# Altium PCB PCB1.PcbDoc
Units mil, origin at the board's own origin, x right, y up, seen from the top; angles counter-clockwise.
Board outline 2700 x 2100 mil, 2 copper layers (Top Layer, Bottom Layer); 15 components, 31 nets, 64 pads, 10 vias.
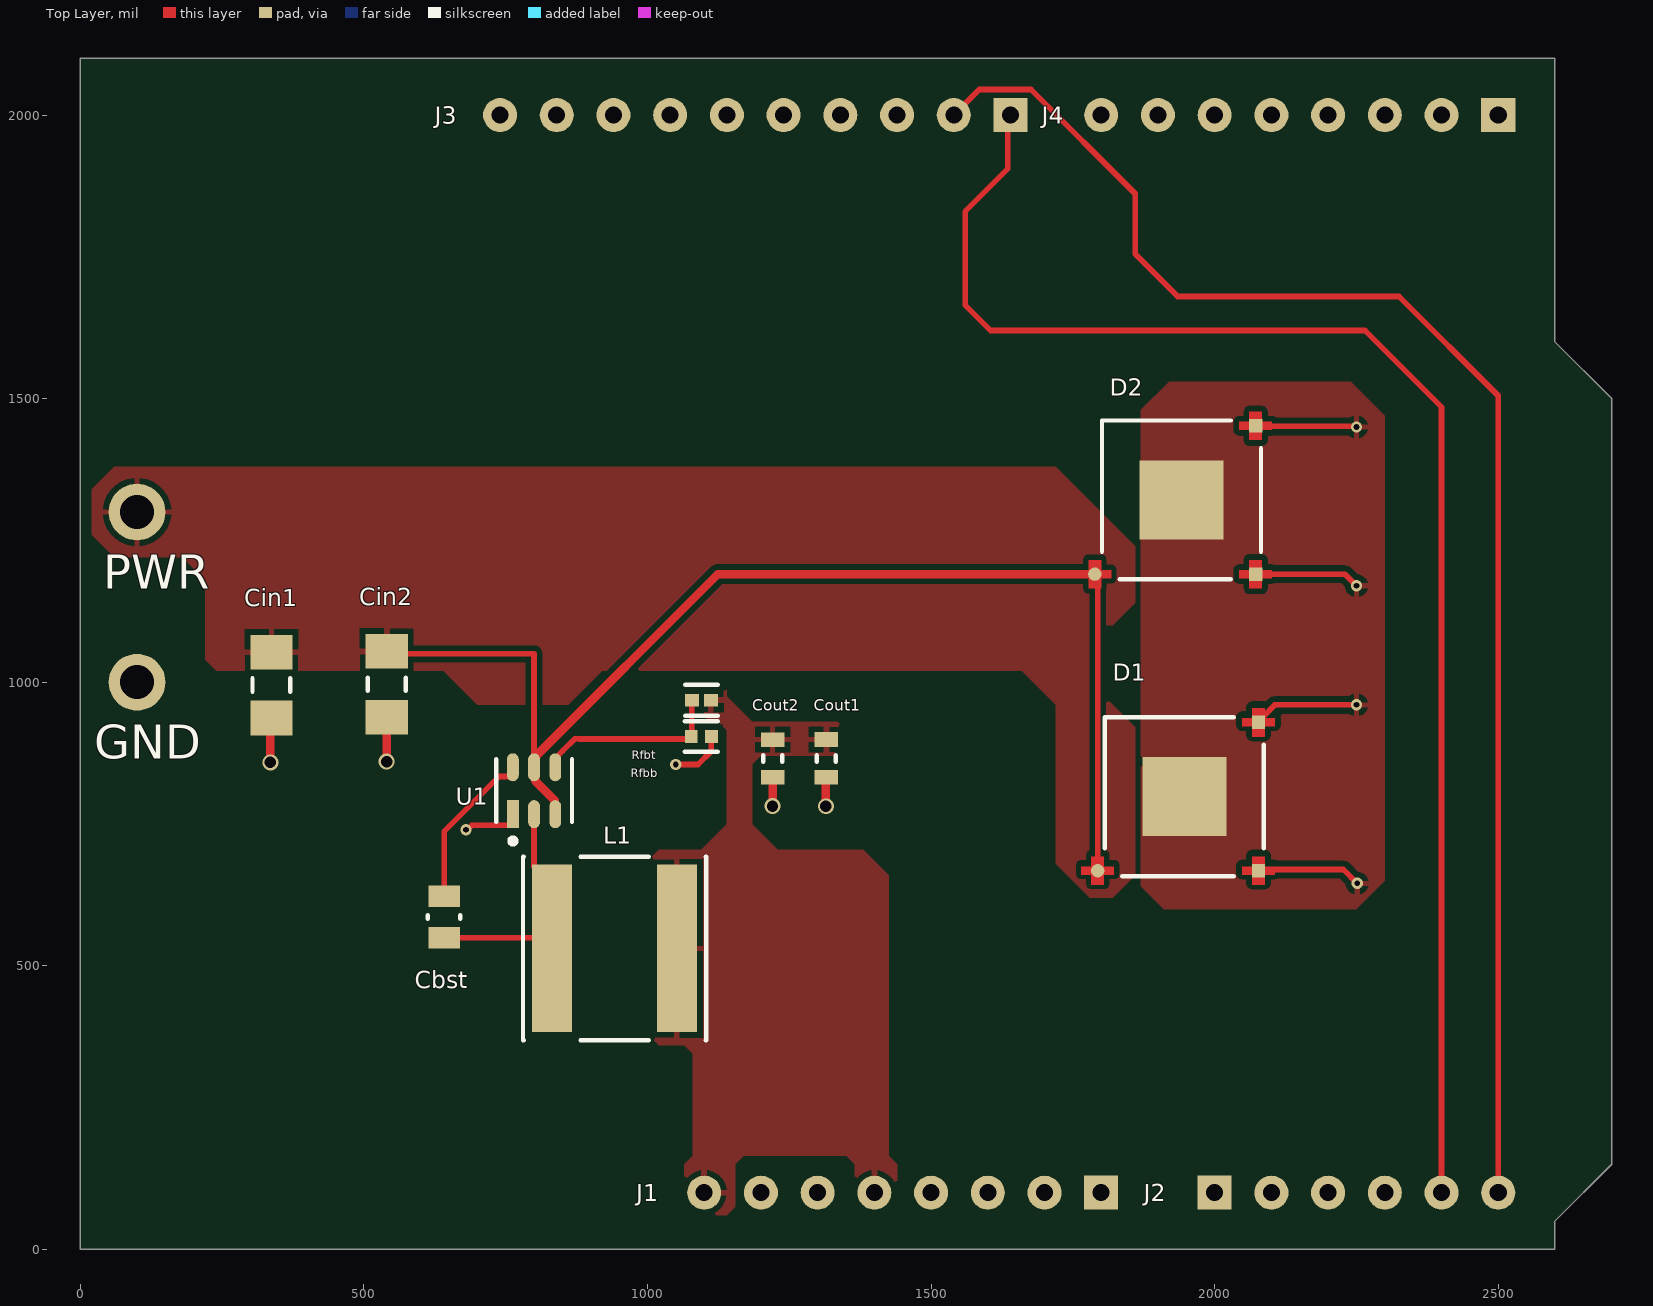
[diagram p0: Top Layer view]
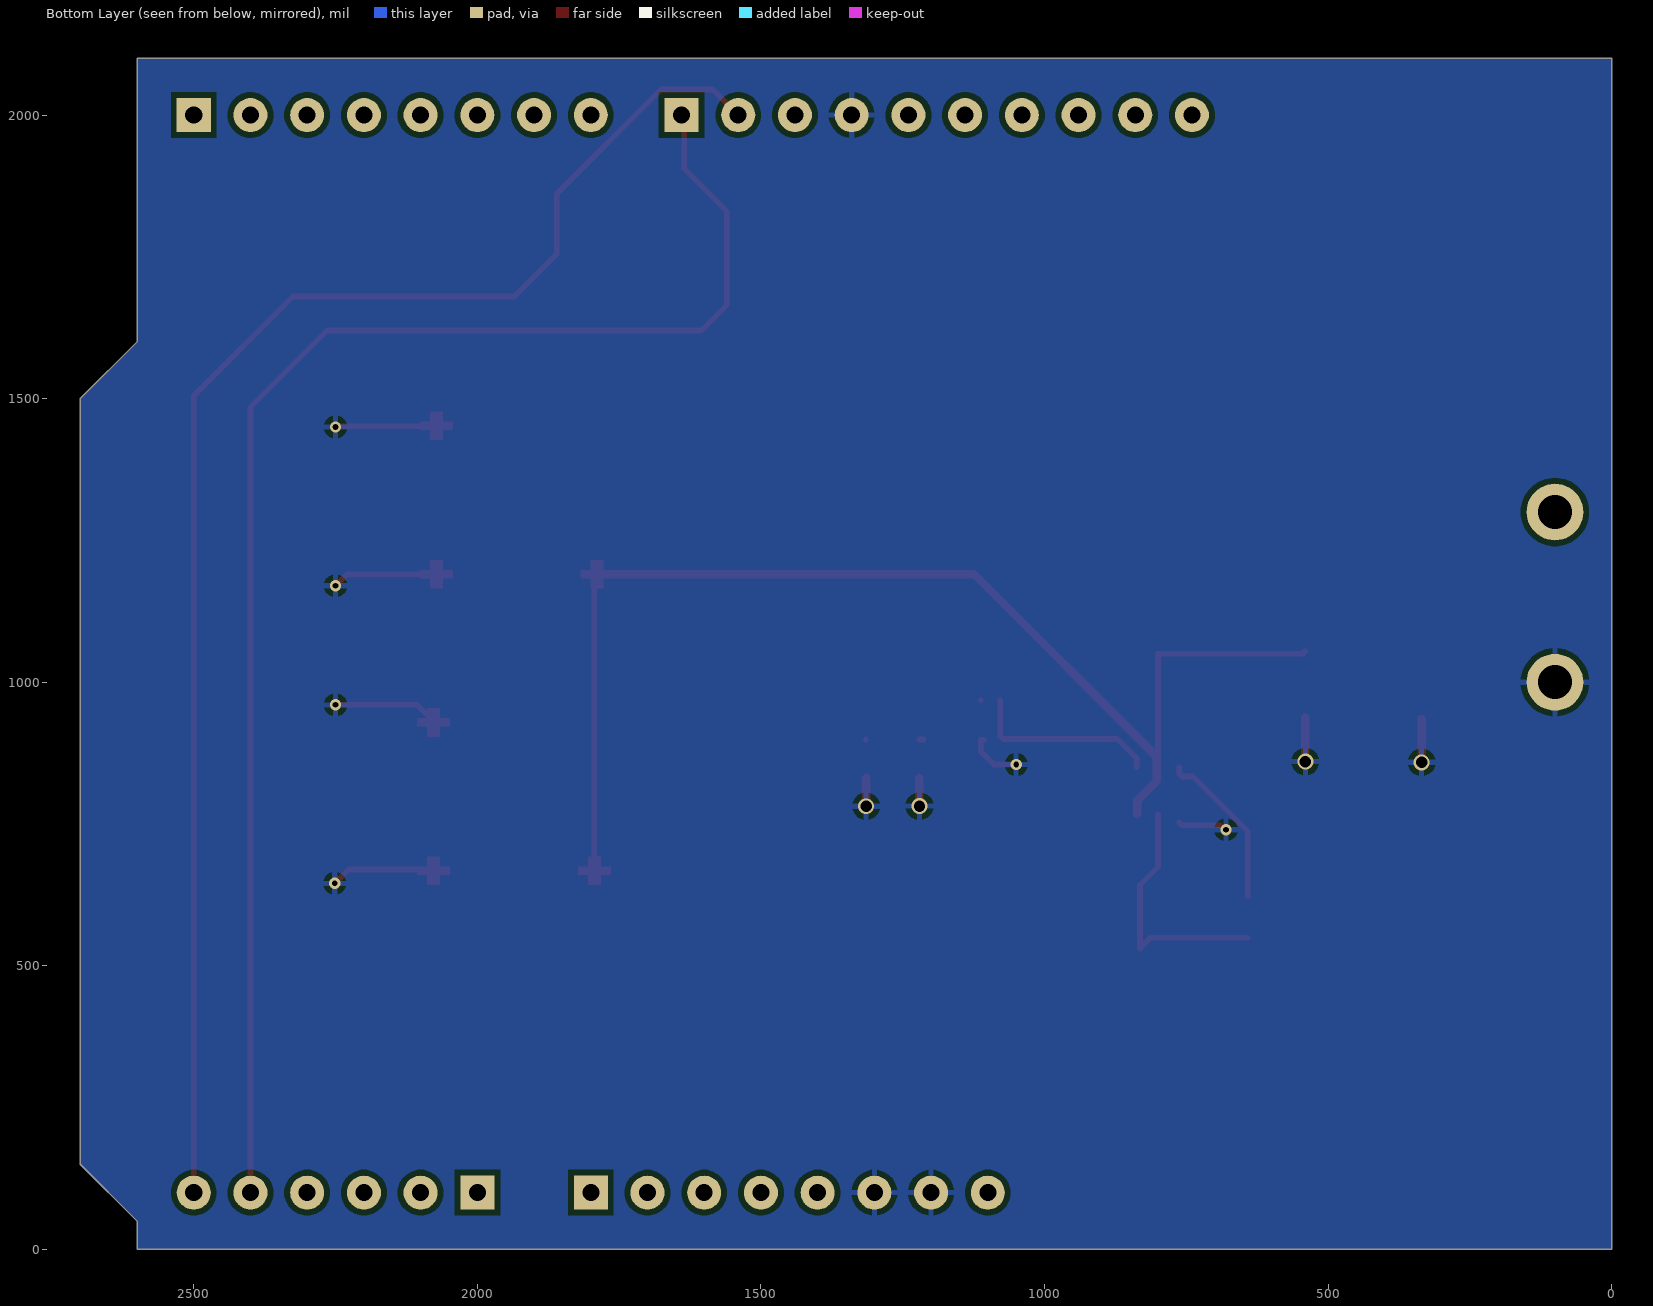
[diagram p1: Bottom Layer view, seen from below]

## Layer stack, top to bottom
Top Solder: solder mask 0.4, Solder Resist, Dk 3.5
Top Layer: signal copper 1.4
Dielectric 1: dielectric 12.6, FR-4, Dk 4.8
Bottom Layer: signal copper 1.4
Bottom Solder: solder mask 0.4, Solder Resist, Dk 3.5

## Board outline
0,0 2600,0 2600,50 2700,150 2700,1500 2600,1600 2600,2100 0,2100

## Design rules (kind name [scope] priority, off if disabled: settings)
Clearance [All] p1: gap=10 ignorepadtopadclearanceinfootprint=TRUE except(0: Arc-Hole Track-Hole SMDPad-Hole THPad-Hole Via-Hole Fill-Hole Poly-Hole Region-Hole Text-Hole)
MinimumSolderMaskSliver [All] p1: minsoldermaskwidth=5
PolygonConnect [All] p1: connectstyle=Relief reliefconductorwidth=10 reliefentries=4 polygonreliefangle="90 Angle" airgapwidth=10
RoutingVias [All] p1: holewidth=10 width=18 viastyle="Through Hole" minholewidth=6 minwidth=14 maxholewidth=28 maxwidth=50
SolderMaskExpansion [All] p1: expansion=0 istentingtop=FALSE
Width [All] p1: maxlimit=30 minlimit=5 preferedwidth=10
29 further rules are at their usual default settings.

## Classes and differential pairs
component class Sheet1: Cin1 Cin2 Cout1 D1 D2 J1 J2 J3 J4 L1 Rfbb U1

## Components (designator, comment, footprint, x,y, rotation, side; value= is the part's Value field where it differs from the comment)
Cbst "CC0805KRX7R8BB104" FP-CC0805-0_85-MFG 641.52,586.02 r90 top value="100 nF"
Cin1 "GRM31CR61E106KA12L" CAPC3216X180X55ML20T25 337.02,995 r270 top
Cin2 "GRM31CR61E106KA12L" CAPC3216X180X55ML20T25 540.35,996.37 r270 top
Cout1 "C1608X5R1A226M080AC" CAPC1608X100X20ML10 1315.11,865.53 r270 top
Cout2 "C1608X5R1A226M080AC" CAPC1608X100X20ML10 1220.64,865.48 r270 top
D1 "LXR7-SW30" FP-LXR7-SW30-MFG 1946.52,798.36 r180 top
D2 "LXR7-SW30" FP-LXR7-SW30-MFG 1941.51,1321.29 r180 top
J1 "8-Pin-Header" 8-Pin-Header-Footprint-1 1800,100 r180 top
J2 "6-pin-Header" 6-pin-Header-Footprint 2000,100 r0 top
J3 "10-pin-header" 10-pin-header-Footprint-1 1640,2000 r180 top
J4 "8-Pin-Header" 8-Pin-Header-Footprint-1 2500,2000 r180 top
L1 "NRS8030T3R3MJGJ" FP-NRS8030-MFG 941.9,530.52 r0 top
Rfbb "CRCW040210K0FKED" FP-CRCW0402-e3-IPC_B 1094.92,904.46 r0 top
Rfbt "AC0402FR-0756K2L" FP-AC0402-IPC_B 1095.26,968.22 r180 top
U1 "TPS562201DDCR" FP-DDC0006A-IPC_C 800,808.65 r90 top

## Footprints (in the part's own frame and the unit in brackets; to place one, negate y for a bottom-side part, rotate by r counter-clockwise, add the part's x,y. Pads: shape width x height; smd on the part's side, far side on the other; paste and mask are expansions set on the pad)
6-pin-Header-Footprint [mil]
  rect 60x60 hole 30: 1(0,0)
  round 60 hole 30: 2(100,0) 3(200,0) 4(300,0) 5(400,0) 6(500,0)
8-Pin-Header-Footprint-1 [mil]
  rect 60x60 hole 30: 1(0,0)
  round 60 hole 30: 2(100,0) 3(200,0) 4(300,0) 5(400,0) 6(500,0) 7(600,0) 8(700,0)
10-pin-header-Footprint-1 [mil]
  rect 60x60 hole 30: 1(0,0)
  round 60 hole 30: 2(100,0) 3(200,0) 4(300,0) 5(400,0) 6(500,0) 7(600,0) 8(700,0) 9(800,0) 10(900,0)
CAPC1608X100X20ML10 [mm] "Chip Capacitor, 2-Leads, Body 1.70x0.90mm, IPC Low Density"
  rect 0.65x1.05 smd: 1(-0.85,0) 2(0.85,0)
  silkscreen extent -0.15,-0.43 0.15,0.43, body extent -0.85,-0.45 0.85,0.45, height 1
CAPC3216X180X55ML20T25 [mm] "Chip Capacitor, 2-Leads, Body 3.4x1.8mm, IPC Low Density"
  rect 1.55x1.9 smd: 1(-1.475,0) 2(1.475,0)
  silkscreen extent -0.3,-0.85 0.3,0.85, body extent -1.7,-0.9 1.7,0.9, height 1.8
FP-AC0402-IPC_B [mil]
  rect 24.23x22.54 smd paste+0: 1(-16.87,0)
  rect 24.23x22.54 smd paste+0 mask+0: 2(16.87,0)
  silkscreen extent -29,-27 29,27, body extent -35,-17 35,17, height 10
FP-CC0805-0_85-MFG [mm]
  rect 0.95x1.4 smd paste+0 mask+0: 1(-0.925,0) 2(0.925,0)
  silkscreen extent -0.08,-0.72 0.08,0.72, body extent -1.6,-1.05 1.6,1.05, height 0.25
FP-CRCW0402-e3-IPC_B [mil]
  rect 22.37x22.54 smd paste+0 mask+0: 1(-17.8,0) 2(17.8,0)
  silkscreen extent -29,-27 29,27
FP-DDC0006A-IPC_C [mm]
  rect 1.254x0.532 smd paste+0 mask+0: 1(-1.05,0.95)
  rrect100% 1.254x0.532 smd paste+0 mask+0: 2(-1.05,0) 3(-1.05,-0.95) 4(1.05,-0.95) 5(1.05,0) 6(1.05,0.95)
  silkscreen extent -2.37,-1.7 1.4,1.7, body extent -1.78,-1.55 1.78,1.55, height 0.25
FP-LXR7-SW30-MFG [mm]
  rect 0.599x0.599 smd paste+0 mask+0: 1(-3.32,3.32) 1(-3.32,-3.32)
  round 0.599 smd paste+0 mask+0: 2(3.88,3.32)
  rect 3.76x3.53 smd paste+0 mask+0: 3(0,0)
  Top Layer region: 3.15,3.5 3.6,3.5 3.6,3.95 4.16,3.95 4.16,3.5 4.61,3.5 4.61,3.14 4.16,3.14 4.16,2.69 3.6,2.69 3.6,3.14 3.15,3.14 3.15,3.5
  Top Layer region: -4.05,-3.14 -3.6,-3.14 -3.6,-2.69 -3.04,-2.69 -3.04,-3.14 -2.59,-3.14 -2.59,-3.5 -3.04,-3.5 -3.04,-3.95 -3.6,-3.95 -3.6,-3.5 -4.05,-3.5 -4.05,-3.14
  Top Layer region: -4.05,3.5 -3.6,3.5 -3.6,3.95 -3.04,3.95 -3.04,3.5 -2.59,3.5 -2.59,3.14 -3.04,3.14 -3.04,2.69 -3.6,2.69 -3.6,3.14 -4.05,3.14 -4.05,3.5
  silkscreen extent -3.56,-3.56 3.56,3.56, body extent -4.15,-4.05 4.71,4.05, height 0.25
FP-NRS8030-MFG [mm]
  rect 1.8x7.5 smd paste+0 mask+0: 1(-2.8,0) 2(2.8,0)
  silkscreen extent -4.1,-4.1 4.1,4.1, body extent -4.2,-4.2 4.2,4.2, height 0.25

## Part data
Cbst: library part CMP-1036-04410-2, "CAP CER 0.1UF 25V X7R 0805", Capacitance="100 nF", Manufacturer=Yageo, Package=CC0805-0.85, Temperature="-30°C to +85°C", Temperature Characteristic=X7R, Temperature Range High=+85°C, Temperature Range Low=-30°C, Tolerance=0.1, Voltage Rating="25 V", Automotive=No, Category=Cap, ComponentLink2Description=Datasheet, ComponentLink2URL=http://www.yageo.com/documents/recent/UPY-GPHC_Y5V_6.3V-to-50V_8.pdf, Device Class L1="Passive Components", Device Class L2=Capacitors, Device Class L3="Ceramic Capacitors", Digikey Description="CAP CER 0.1UF 25V X7R 0805", Footprint Url=http://www.yageo.com/exep/pages/download/literatures/UPY-C_GEN_24.pdf, Height=0.95mm, Ipc Land Pattern Name=CAPC200125X85, Lead Free=Yes, Manufacturer Part Number=CC0805KRX7R8BB104, Material=Ceramic, Mouser Description="Multilayer Ceramic Capacitors MLCC - SMD/SMT 100nF 25V X7R 10%", Octopart=https://octopart.com/cc0805krx7r8bb104-yageo-39467766, RoHS=TRUE
Cin1 Cin2: library part CMP-2000-04947-1, "Chip Capacitor, 10 uF, +/- 10%, 25 V, -55 to 85 degC, 1206 (3216 Metric), RoHS, Tape and Reel", Capacitance=10uF, Case Code - in=1206, Case Code - mm=3216, Case Height=1.6mm, Case Length=3.2mm, Dielectric=X5R, Manufacturer=Murata, Maximum Operating Temperature=+85C, Minimum Operating Temperature=-55C, Package / Case=1206(3216metric), Package Description="2-Pin Surface Mount Device, Body 3.2 x 1.6 mm", Tolerance=10%, Voltage Rating DC=25V, Brand=MurataElectronics, Case Width=1.6mm, Datasheet URL=https://datasheet.ciiva.com/11786/0900766b80ef921d-11786983.pdf, Datasheet Version=Sep-13, Factory Pack Quantity=2000, Manufacturer URL=http://www.murata.com/, Package Reference=1206, Packaging=Reel, Product=GeneralTypeMLCCs, Product Category=MultilayerCeramicCapacitorsMLCC-SMD/SMT, RoHS=Details, Series=GRM, Termination Style=SMD/SMT, Type=GeneralPurposeMLCC
Cout1 Cout2: library part CMP-2000-05441-1, "Chip Capacitor, 22 uF, +/- 20%, 10 V, -55 to 85 degC, 0603 (1608 Metric), RoHS, Tape and Reel", Capacitance=22µF, Manufacturer=TDK, Operating Temperature=-55degC~85degC, Package / Case=0603(1608Metric), Package Description="2-Pin Surface Mount Device, Body 1.6 x 0.8 mm", Package Reference=603, PCN Part Number=MLCCPartNumberChange30/Nov/2012, Ratings=-, Standard Package=1, Temperature Coefficient=X5R, Tolerance=±20%, Voltage - Rated=10V, Applications=GeneralPurpose, Category=Capacitors, Datasheet URL=http://download.siliconexpert.com/pdfs/2015/4/21/15/54/45/779/tdk_/manual/37024850441143360mlcc_commercial_general_en.pdf, Datasheet Version=Mar-15, Design Resources=20WNon-IsolatedBuckLEDDriverUsingPLLNK460KG, Family=CeramicCapacitors, Features=-, Height - Seated (Max)=-, Kits=445-9014-KIT-ND-KITMLCC100PF-22UF060310-50V, Lead Spacing=-, Lead Style=-, Manufacturer URL=http://www.tdk.com/, Mounting Type=SurfaceMount,MLCC, Online Catalog=CSeries,GeneralPurpose, Other Names=445-9077-1, Packaging=CutTape(CT), Product Training Modules=CSeriesGeneralApplicationsSEAT,CCV,andTVCLDesignToolsGuidetoReplacinganElectrolyticCapacitorwithanMLCC, RoHS Information=RoHSCertificate-MLCC, Series=C, Size / Dimension="0.063\"Lx0.031\"W(1.60mmx0.80mm)", Thickness (Max)="0.035\"(0.90mm)"
D1 D2: library part CMP-2100-00228-2, "LED LUXEON WARM WHITE 3000K 2SMD", Colour=White, Forward Current=1200mA, Forward Voltage=11.2V, Manufacturer="Philips Lumileds", Max Junction Temp=+135°C, Temperature="-40°C to +135°C", Temperature Range Low=-40°C, Automotive=No, Category=Diode, ComponentLink2Description=Datasheet, ComponentLink2URL=https://www.lumileds.com/uploads/354/DS103-pdf, Device Class L1=Optoelectronics, Device Class L2=LEDs, Device Class L3=unset, Digikey Description="LED LUXEON WARM WHITE 3000K 2SMD", Height=3.87mm, Lead Free=Yes, Led Orientation="Top View", Luminous Flux=1000lm, Manufacturer Part Number=LXR7-SW30, Mouser Description="High Power LEDs - White Warm White, 3000K 840lm, 700mA, 70CRI", Octopart=https://octopart.com/lxr7-sw30-philips+lumileds-23267781, Package=LXR7-SW30, RoHS=TRUE, Temperature Range High=+135°C, Viewing Angle=120°
J1 J4: library part CMP-002-00072-5
J2: library part CMP-002-00071-7
J3: library part CMP-002-00073-5
L1: library part CMP-14484-000405-1, "Inductor Power Shielded Wirewound 3.3uH 20% 100KHz Ferrite 4.2A 24.7mΩ DCR T/R", Case/Package=Nonstandard, Current Rating=4.3A, DC Resistance (DCR)=19mR, Inductance=3.3uH, Inductance Tolerance=20%, Max DC Current=4.2A, Max Operating Temperature=125°C, Min Operating Temperature=-25°C, Package Quantity=1000, Resistor Type=Wirewound, Self Resonant Frequency=50MHz, Test Frequency=100kHz, Core Material=Ferrite, Depth=8.2mm, Halogen Free="Halogen Free", Height=3mm, Height - Seated (Max)=0.118inch, Lead Free="Lead Free", Lead Pitch=5.6mm, Length=8mm, Mount="Surface Mount", Number of Pins=2, Packaging="Tape and Reel", Radiation Hardening=No, REACH SVHC="No SVHC", RMS Current (Irms)=4.3A, RoHS Compliant=Yes, Saturation Current=4.2A, Series=NRS, Shielding=Shielded, Termination=SMD/SMT, Tolerance=20%, Width=0.315inch
Rfbb: library part CMP-2002-08135-2, "RES SMD 10K OHM 1% 1/16W 0402", Case Code (Imperial)=0402, Case Code (Metric)=1005, Max Operating Temperature=155°C, Max Power Dissipation=63mW, Min Operating Temperature=-55°C, Package Quantity=10, Resistance=10kR, Temperature Coefficient=100ppm/°C, Tolerance=1%, Voltage Rating=50V, Case/Package=0402, Composition="Thick Film", Contact Plating=Tin, Depth=0.5mm, Features="Automotive AEC-Q200", Height=0.35mm, Lead Free="Lead Free", Length=1mm, Military Standard=Not, Mount="Surface Mount", Number of Pins=2, Number of Terminations=2, Packaging="Tape and Reel", Power Rating=63mW, Radiation Hardening=No, Termination=SMD/SMT, Voltage Rating (DC)=50V, Weight=2.3E-05oz, Width=0.02inch
Rfbt: library part CMP-03412-003341-2, "RES 56.2kΩ ±1% 0.063W 0402", Case/Package=0402, Max Operating Temperature=155°C, Max Power Dissipation=63mW, Min Operating Temperature=-55°C, Resistance=56.2kR, Resistor Type="Thick Film", Temperature Coefficient=100ppm/°C, Tolerance=1%, Features="Moisture Resistant", Height=0.015inch, Length=0.039inch, Number of Terminations=2, Packaging="Tape and Reel", RoHS Compliant=Yes, Series=AC, Width=0.02inch
U1: library part CMP-019-00049-1, "Switching Regulator, 2A, 580kHz Switching Freq-Max, PDSO6", Case/Package=TSSOP, Frequency=580kHz, Max Operating Temperature=125°C, Max Supply Voltage=17V, Min Input Voltage=4.5V, Min Operating Temperature=-40°C, Nominal Supply Voltage=12V, Package Body Material=Plastic, Package Shape=Rectangular, Package Style="SMALL OUTLINE, THIN PROFILE, SHRINK PITCHMeter", Temperature Grade=AUTOMOTIVE, Channels=1, Control Technique="PULSE WIDTH MODULATION", Height - Seated (Max)=1.1mm, JESD-30 Code=R-PDSO-G6, JESD-609 Code=e3, Length=2.9mm, Moisture Sensitivity Level=1, Pins=6, Reach SVHC Compliant=Yes, RoHS Compliant=Yes, Surface Mount=Yes, Switcher Configuration=BUCK, Terminal Finish=Tin, Terminal Form="Gull Wing", Terminal Pitch=0.95mm, Terminal Position=DUAL, Throw Configuration="SWITCHING REGULATOR", Width=1.6mm

## Free pads (board coordinates)
  round 100 hole 60: 15(100,1300) 16(100,1000)

## Via types
v1: diameter 20, hole 10, Top Layer to Bottom Layer, 6 vias
v2: diameter 28, hole 20, Top Layer to Bottom Layer, 4 vias

## Nets (pads, with @x,y where several pads share a name; then routed paths per layer and width w, separated by ;. In a path a pad name is that pad's centre, name@x,y a point inside that pad or via, vN(x,y) a via of type N, cw(c..) or ccw(c..) an arc to the next point about the centre after c; other vN are vias at no path point)
3.3V: J1.4
+5: Cout1.1 Cout2.1 J1.5 J1.8 L1.2 Rfbt.1 | length 8.8
  Top Layer w10: Rfbt.1 Rfbt.1@1112.97,968.22 ; Cout2.1@1212.76,898.94 Cout2.1
+12: Cin1.1 Cin2.1 D1.2 D2.2 pad.15 U1.3 U1.5 | length 2220.2
  Top Layer w10: Cin2.1 544.79,1050 800,1050 U1.5 ; U1.5@802.1,826.03 802.62,825.5 ; D2.2 1788.76,1186.9 1793.8,1181.86 D1.2@1793.8,669.87
  Top Layer w15: U1.5@802.1,826.03 802.1,868.47 1124.2,1190.58 D2.2 ; 802.62,825.5 836.26,791.86 836.26,768.44 U1.3
A0: J2.1
A1: J2.2
A2: J2.3
A3: J2.4
A4: J2.5 J3.1 | length 2667.7
  Top Layer w10: J3.1 1635,1995 1635,1905 1560,1830 1560,1665 1605,1620 2265,1620 2400,1485 J2.5
A5: J2.6 J3.2 | length 2669.5
  Top Layer w10: J3.2 1585,2045 1676.21,2045 1860,1861.21 1860,1755 1935,1680 2325,1680 2500,1505 J2.6
AREF: J3.3
D0: J4.8
D1: J4.7
D2: J4.6
D3: J4.5
D4: J4.4
D5: J4.3
D6: J4.2
D7: J4.1
D8: J3.10
D9: J3.9
D10: J3.8
D11: J3.7
D12: J3.6
D13: J3.5
GND: Cin1.2 Cin2.2 Cout1.2 Cout2.2 D1.1 D1.3 D2.1 D2.3 J1.6 J1.7 J3.4 pad.16 Rfbb.2 U1.1 | length 1178.7
  Top Layer w10: Cin1.2@335.04,934.95 Cin1.2 ; Cin2.2@540,937.95 Cin2.2 ; v1(680,740) 682.71,740 690.31,747.61 757.12,747.61 U1.1@762.6,753.08 ; v1(1050,855) 1089.14,855 1112.33,878.19 1112.33,898.19 1112.24,898.27 Rfbb.2@1106.54,898.27 ; Cout2.2@1220.48,831.85 Cout2.2 ; Cout1.2@1314.55,831.49 Cout1.2 ; D2.1@2072.22,1190.58 2229.42,1190.58 v1(2250,1170) ; D2.1@2072.22,1452 2073.22,1451 2249,1451 v1(2250,1450) ; D1.1@2077.26,669.87 2226.95,669.87 v1(2251.5,645.31) ; D1.1@2077.26,931.29 2105.97,960 v1(2250,960)
  Top Layer w15: v2(335.04,858.77) Cin1.2@335.04,934.95 ; v2(540,860) Cin2.2@540,937.95 ; v2(1220.48,781.5) Cout2.2@1220.48,831.85 ; v2(1314.55,781.29) Cout1.2@1314.55,831.49
IOREF: J1.2
N-C: J1.1
NetCbst_2: Cbst.2 U1.6 | length 289
  Top Layer w10: Cbst.2 641.52,736.88 738.33,833.69 757.54,833.69 762.6,838.75 U1.6
NetRfbb_1: Rfbb.1 Rfbt.2 U1.4 | length 335.8
  Top Layer w10: U1.4 837.4,865.73 851.18,879.51 871.69,900.02 879.98,900.02 1072.66,900 Rfbb.1 1077.75,905.09 1077.75,967.59 Rfbt.2
RESET: J1.3
SW_OUT: Cbst.1 L1.1 U1.2 | length 448
  Top Layer w10: Cbst.1 812.58,549.61 L1.1 831.67,642.72 800,674.39 U1.2

## Polygon pours and split planes (outlines as drawn)
+12 on Top Layer "+12_L01_P039" (solid, pour order 39): 20,1340 20,1260 60,1220 180,1220 220,1180 220,1040 240,1020 640,1020 700,960 860,960 920,1020 1660,1020 1720,960 1720,680 1780,620 1820,620 1860,660 1860,920 1800,980 1800,1100 1820,1100 1860,1140 1860,1240 1720,1380 60,1380
+5 on Top Layer "+5_L01_P051" (solid, pour order 51): 1080,60 1065,75 1065,150 1080,165 1080,345 1065,360 1020,360 1005,375 1005,690 1020,705 1095,705 1140,750 1140,915 1125,930 1110,930 1095,945 1095,990 1110,1005 1125,1005 1140,990 1140,975 1185,930 1335,930 1350,915 1350,885 1335,870 1200,870 1185,855 1185,750 1230,705 1380,705 1425,660 1425,165 1440,150 1440,75 1425,60 1380,60 1365,75 1365,150 1350,165 1170,165 1155,150 1155,75 1140,60
GND on Top Layer "GND_L01_P007" (solid, pour order 7): 1870,870 1880,860 1870,850 1870,640 1910,600 2250,600 2300,650 2300,1470 2240,1530 1920,1530 1870,1480 1870,1390
GND on Bottom Layer "GND_L02_P000" (solid, pour order 0): 0,2100 2600,2100 2600,1600 2700,1500 2700,150 2600,50 2600,0 0,0

## Silkscreen, mask and mechanical layers (free items; w line width, h text height)
Top Overlay:
  text "PWR" at 40,1165 h60
  text "GND" at 25,865 h60